# Altium PCB merigold_v2.PcbDoc
Units mm, origin at the board's own origin, x right, y up, seen from the top; angles counter-clockwise.
Board outline 99.57 x 99.57 mm, 2 copper layers (Top Layer, Bottom Layer); 46 components, 37 nets, 173 pads, 10 vias.
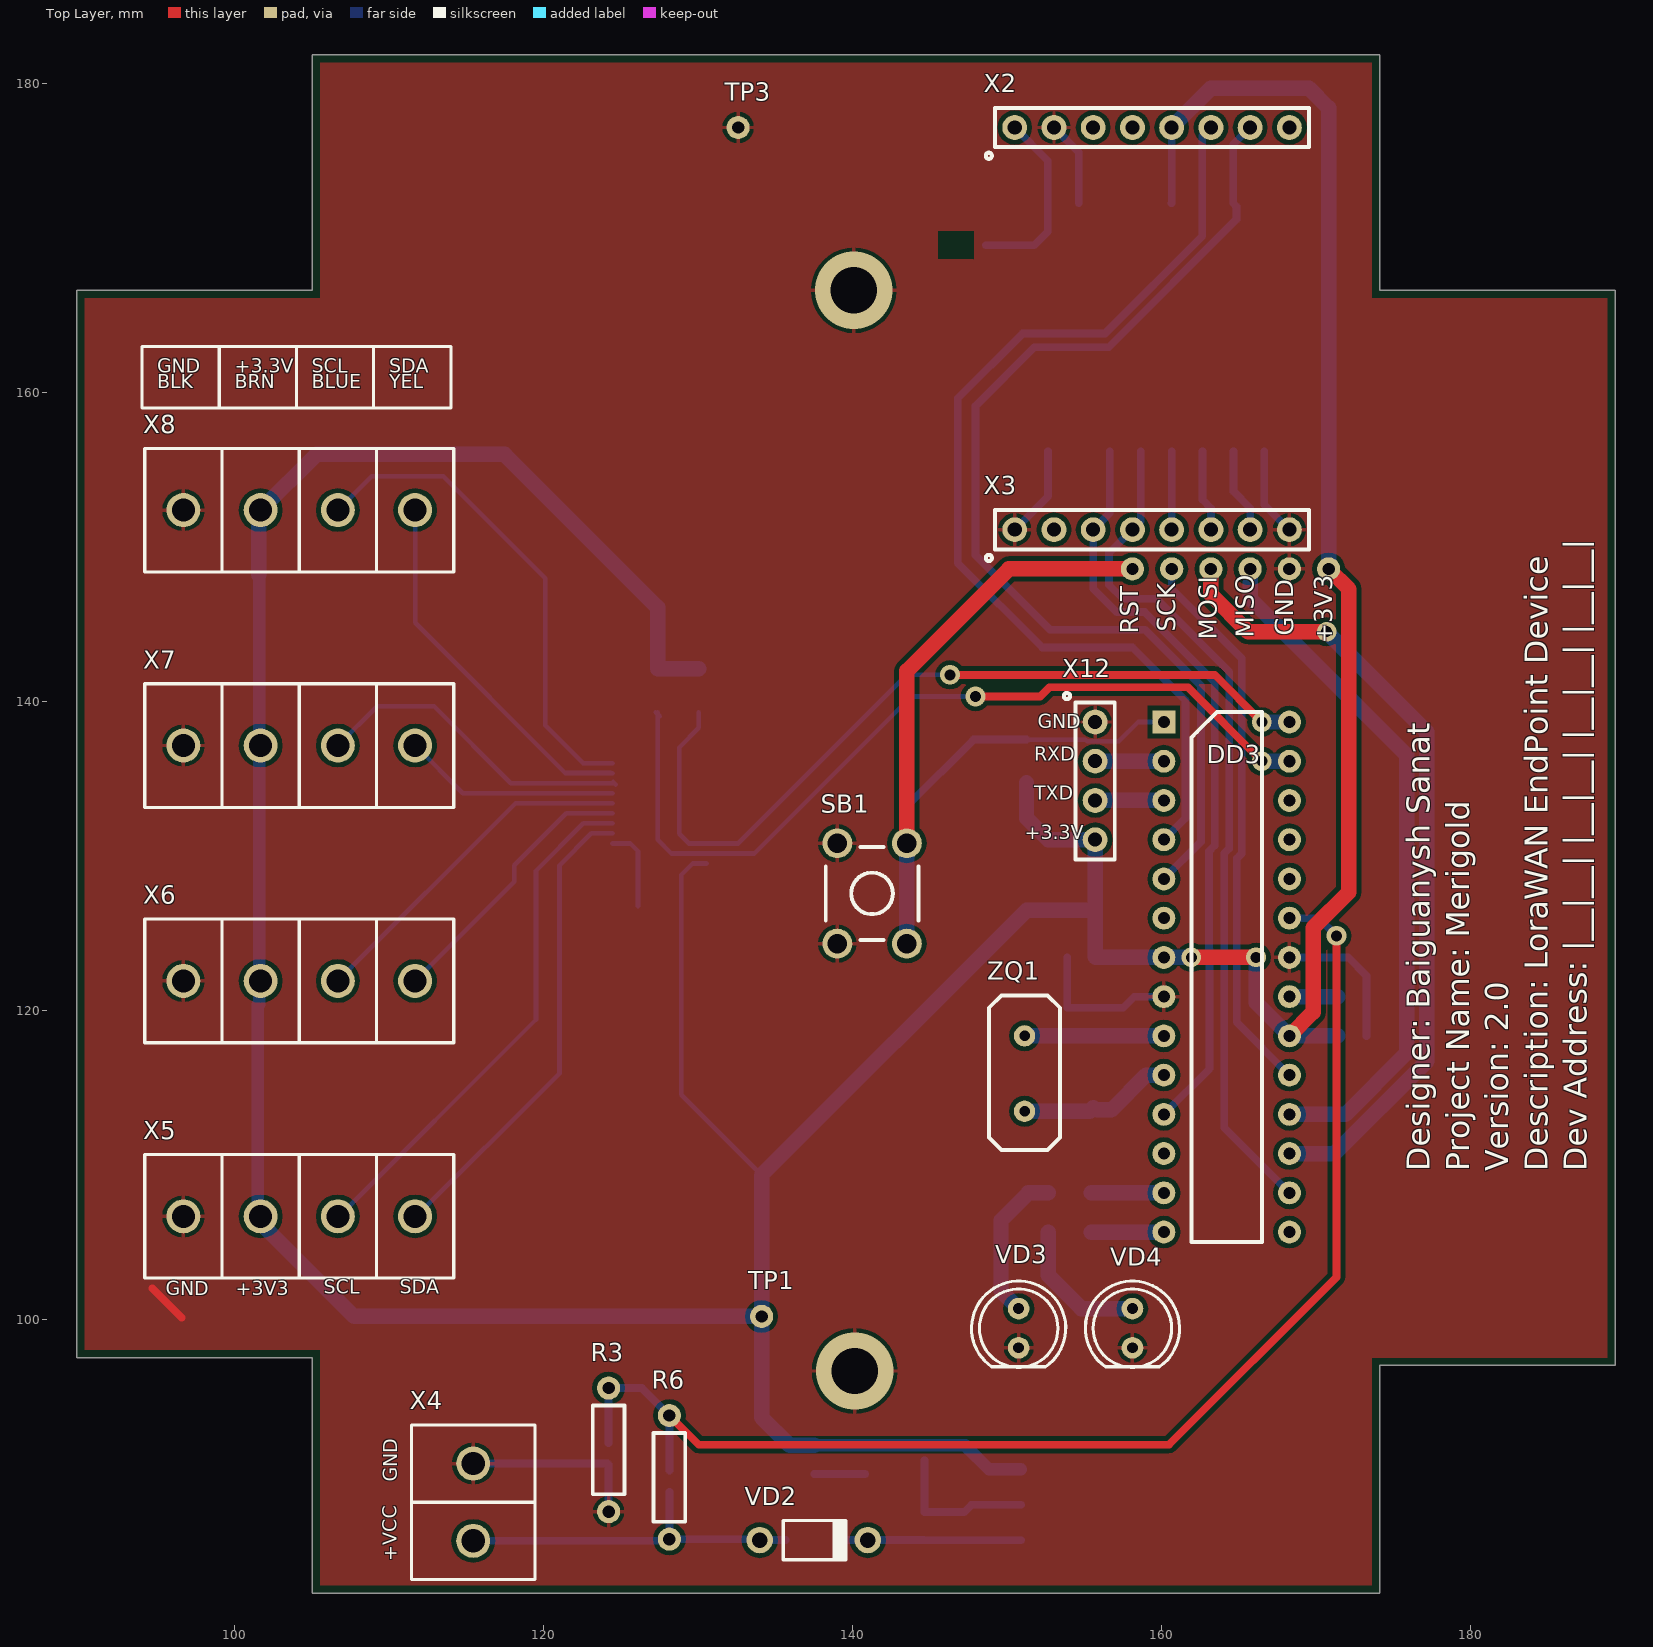
[diagram p0: Top Layer view]
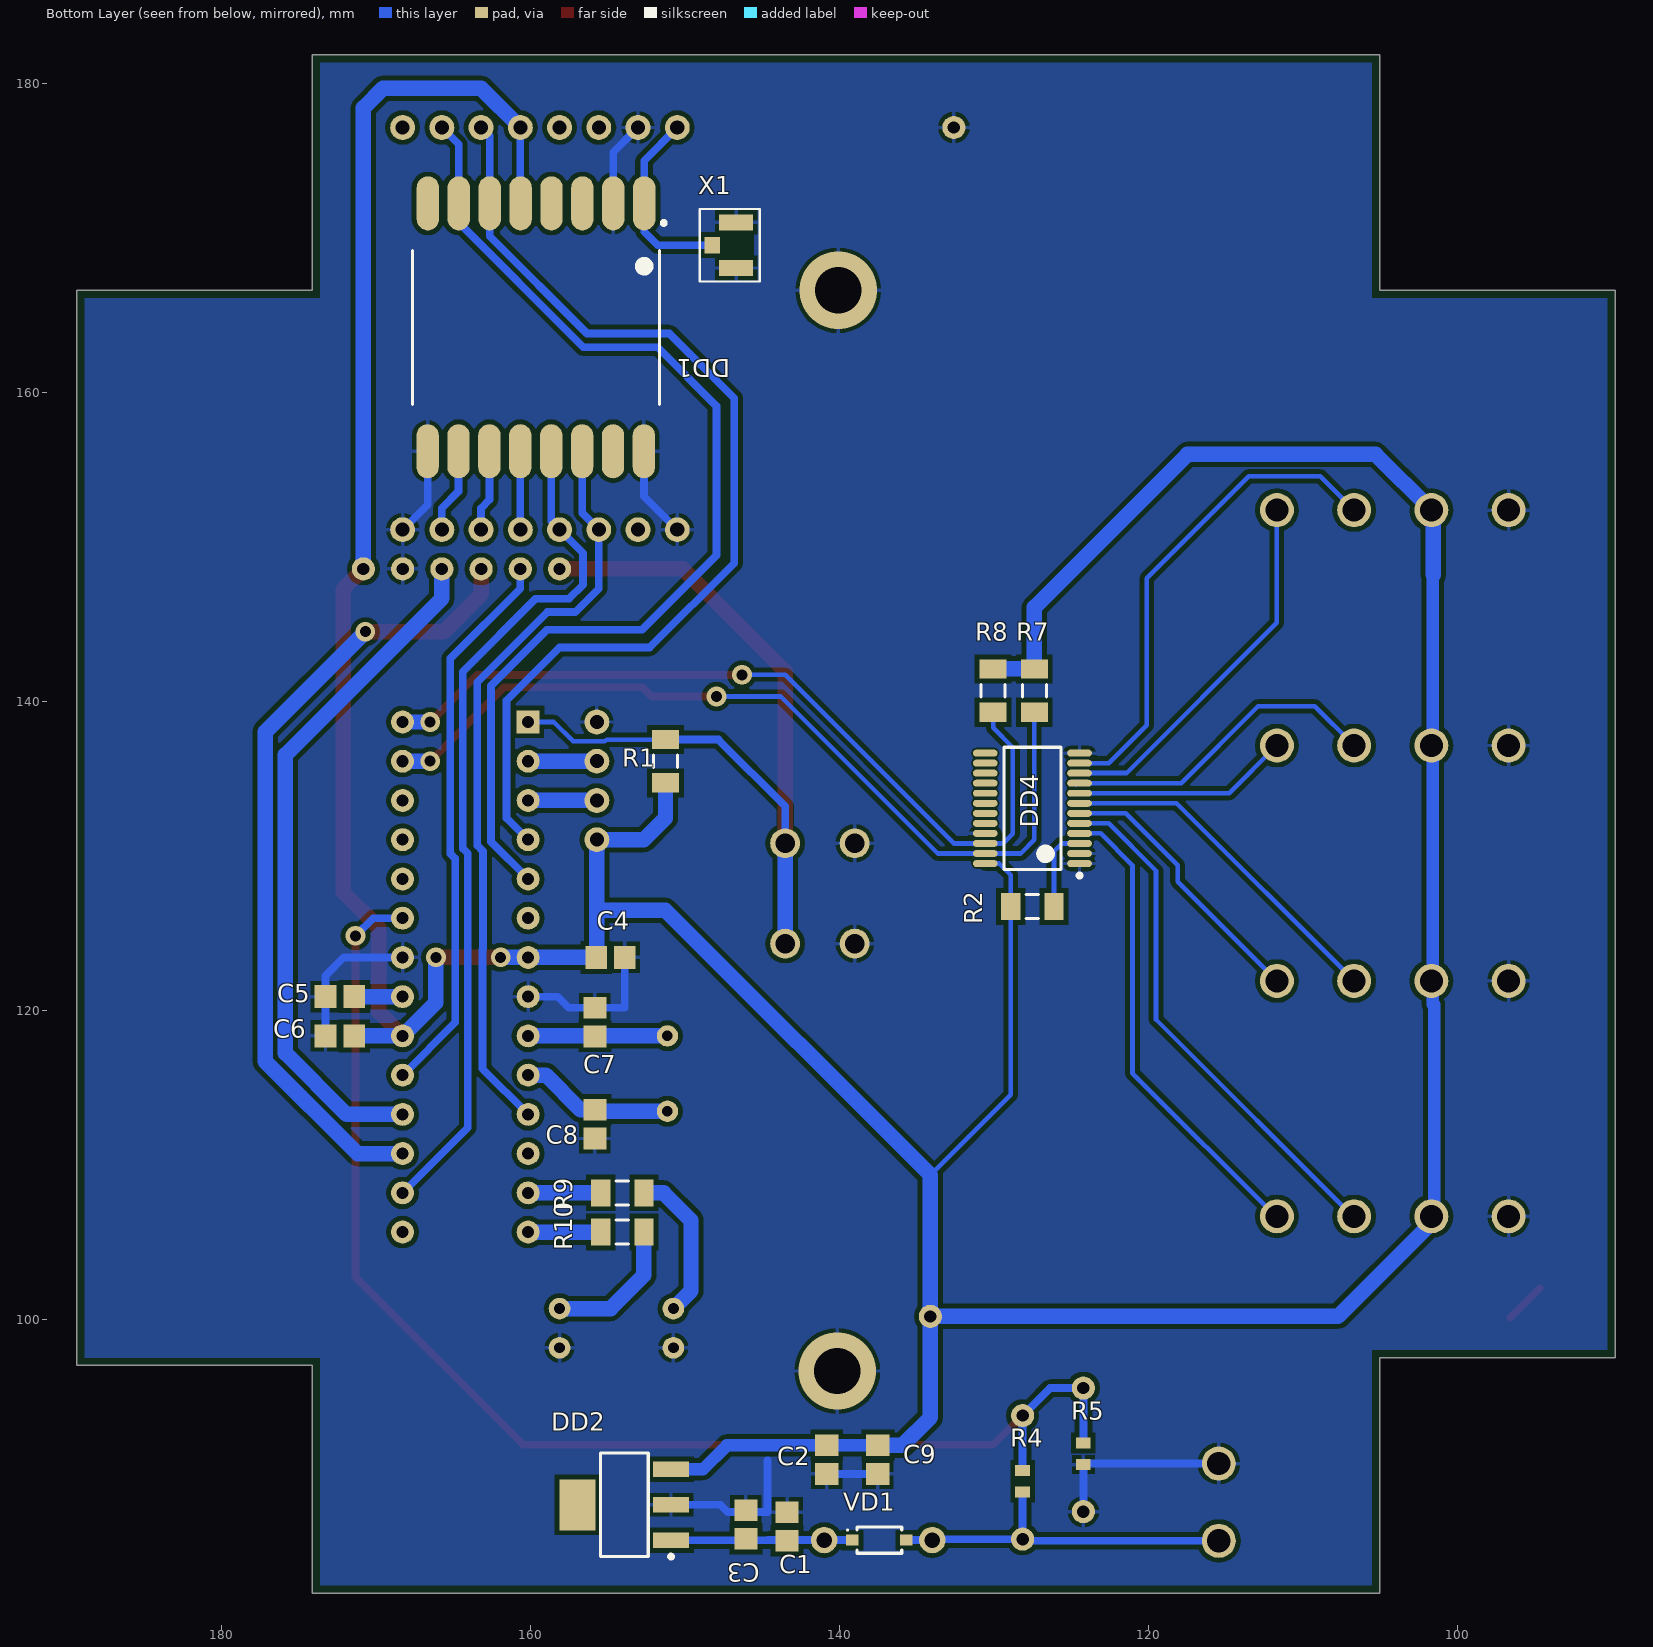
[diagram p1: Bottom Layer view, seen from below]

## Layer stack, top to bottom
Top Solder: solder mask 0.0102, Solder Resist, Dk 3.5
Top Layer: signal copper 0.0356
Dielectric 1: dielectric 0.32, FR-4, Dk 4.8
Bottom Layer: signal copper 0.0356
Bottom Solder: solder mask 0.0102, Solder Resist, Dk 3.5

## Board outline
89.789,97.536 89.789,166.624 105.029,166.624 105.029,181.864 174.117,181.864 174.117,166.624 189.357,166.624 189.357,97.028 174.117,97.028 174.117,82.296 105.029,82.296 105.029,97.536

## Design rules (kind name [scope] priority, off if disabled: settings)
Clearance Clearance_TSSOP [HasFootprint('TSOP65P640X120-24M')] p1: gap=0.1 ignorepadtopadclearanceinfootprint=FALSE
Clearance [All] p2: gap=0.3 ignorepadtopadclearanceinfootprint=FALSE
PolygonConnect [All] p1: connectstyle=Relief reliefconductorwidth=0.254 reliefentries=4 polygonreliefangle="90 Angle" airgapwidth=0.254
RoomDefinition merigold [InComponentClass('merigold')] p1: confinementstyle=ConfineIn formatcopy=TRUE lockcomponents=FALSE outline 79.146,74.295 196.266,74.295 196.266,187.909 79.146,187.909
RoutingVias [All] p1: holewidth=0.711 width=1.27 viastyle="Through Hole" minholewidth=0.711 minwidth=1.27 maxholewidth=0.711 maxwidth=1.27
SolderMaskExpansion [All] p1: expansion=0.102 istentingtop=FALSE
Width [All] p1: maxlimit=5 minlimit=0.254 preferedwidth=0.254
30 further rules are at their usual default settings.

## Components (designator, comment, footprint, x,y, rotation, side; value= is the part's Value field where it differs from the comment)
+3V3 "TP_TH" TH_TP 170.815,148.59 r0 top
C1 "10U10V_CAPC" CAPC2012X14M/0805 143.383,86.614 r270 bottom
C2 "10U10V_CAPC" CAPC2012X14M/0805 140.818,90.932 r90 bottom
C3 "100N50V_CAPC" CAPC2012X14M/0805 146.05,86.741 r270 bottom
C4 "100N50V_CAPC" CAPC2012X14M/0805 154.813,123.444 r0 bottom
C5 "100N50V_CAPC" CAPC2012X14M/0805 172.339,120.904 r0 bottom
C6 "100N50V_CAPC" CAPC2012X14M/0805 172.339,118.364 r0 bottom
C7 "22P250V_CAPC" CAPC2012X14M/0805 155.829,119.253 r270 bottom
C8 "22P250V_CAPC" CAPC2012X14M/0805 155.829,112.649 r90 bottom
C9 "100N50V_CAPC" CAPC2012X14M/0805 137.516,90.932 r90 bottom
DD1 "HPD13A (RFM95)" SOJ200P1600X200-16M 159.639,164.211 r270 bottom
DD2 "LM1117MPX-3.3/NOPB" SOT230P700X180-4M 153.924,88.011 r0 bottom
DD3 "ATMEGA328" PDIP28 164.211,122.174 r0 top
DD4 "TCA9548A" TSOP65P640X120-24M 127.508,133.096 r0 bottom
GND "TP_TH" TH_TP 168.275,148.59 r0 top
MISO "TP_TH" TH_TP 165.735,148.59 r0 top (schematic designator TP7)
MOSI "TP_TH" TH_TP 163.195,148.59 r0 top (schematic designator TP6)
R1 "10K1206" RESC3216X07N/1206 151.257,136.144 r270 bottom
R2 "10K1206" RESC3216X07N/1206 127.508,126.746 r0 bottom
R3 "RNF14FTD100K" RESAD800W55L600D230 124.206,91.567 r90 top
R4 "100K0603" RESC1608X06N/0603 128.143,89.535 r270 bottom
R5 "100K0603" RESC1608X06N/0603 124.206,91.313 r90 bottom
R6 "RNF14FTD100K" RESAD800W55L600D230 128.143,89.789 r270 top
R7 "10K1206" RESC3216X07N/1206 127.381,140.716 r90 bottom
R8 "10K1206" RESC3216X07N/1206 130.048,140.716 r90 bottom
R9 "200R1206" RESC3216X07N/1206 154.051,108.204 r0 bottom
R10 "200R1206" RESC3216X07N/1206 154.051,105.664 r0 bottom
RST "TP_TH" TH_TP 158.115,148.59 r0 top
SB1 "BTN_TACTILE_6X6" BTN_TACTILE_6X6 139.01,124.333 r90 top
SCK "TP_TH" TH_TP 160.655,148.59 r0 top (schematic designator TP5)
TP1 "TP_TH" TH_TP 134.112,100.203 r0 top
TP3 "TP_TH" TH_TP 132.588,177.165 r0 top
VD1 "MBR120VLSFT1G" SOD-123 137.414,85.725 r180 bottom
VD2 "HER107G R0G" DO-204AL 133.985,85.725 r0 top
VD3 "LED_SSL-LX5093GD-TR26" LED500 150.749,100.711 r270 top
VD4 "LED_SSL-LX5093GD-TR26" LED500 158.115,100.711 r270 top
X1 "U.FL-R-SMT-1_sch" U.FL-R-SMT-1 146.685,169.545 r270 bottom
X2 "PLS_8" PLS_8 150.495,177.165 r90 top
X3 "PLS_8" PLS_8 150.495,151.13 r90 top
X4 "2EDGV-5.0-02P" 2EDGV-5.0-02P 115.443,85.678 r90 top
X5 "2EDGV-5.0-04P" 2EDGV-5.0-04P 111.68,106.68 r180 top
X6 "2EDGV-5.0-04P" 2EDGV-5.0-04P 111.68,121.92 r180 top
X7 "2EDGV-5.0-04P" 2EDGV-5.0-04P 111.68,137.16 r180 top
X8 "2EDGV-5.0-04P" 2EDGV-5.0-04P 111.68,152.4 r180 top
X12 "61300411121" PLS_4 155.702,138.684 r0 top
ZQ1 "HC49U-8-30-50-70-30-ATF" XTAL1050X465X350 151.13,113.484 r90 top

## Footprints (in the part's own frame and the unit in brackets; to place one, negate y for a bottom-side part, rotate by r counter-clockwise, add the part's x,y. Pads: shape width x height; smd on the part's side, far side on the other; paste and mask are expansions set on the pad)
2EDGV-5.0-02P [mm]
  round 2.2 hole 1.5: 1(0,0) 2(5,0)
  silkscreen extent -2.5,-4 7.5,4, body extent -2.5,-4 7.5,4, height 12
2EDGV-5.0-04P [mm]
  round 2.2 hole 1.5: 1(0,0) 2(5,0) 3(10,0) 4(15,0)
  silkscreen extent -2.5,-4 17.5,4, body extent -2.5,-4 17.5,4, height 12
BTN_TACTILE_6X6 [mm] "SWITCH TACTILE SPST-NO 0.05A 24V"
  round 1.94 hole 1.24: 1(0,0) 2(6.5,0) 3(0,-4.5) 4(6.5,-4.5)
  silkscreen extent 0.25,-5.25 6.25,0.75, body extent 0.25,-5.25 6.25,0.75, height 8
CAPC2012X14M/0805 [mm] "Chip Capacitor, 2-Leads, Body 2,00x1,25mm, IPC Low Density"
  rect 1.4x1.5 smd: 1(-0.925,0) 2(0.925,0)
  body extent -1,-0.63 1,0.63, height 1.35
DO-204AL [mm]
  round 1.71 hole 1.01: A(0,0) K(7,0)
  silkscreen extent 1.52,-1.27 5.59,1.27
LED500 [mm]
  round 1.4 hole 0.7: A(0,0) K(2.54,0)
  silkscreen extent -1.77,-3.05 3.81,3.05, body extent -1.73,-3 4.27,3, height 8.6
PDIP28 [mil] "Plastic Dual  Inline Package 28-lead"
  rect 58.39x58.39 hole 30.83: 1(-160,650)
  round 58.39 hole 30.83: 2(-160,550) 3(-160,450) 4(-160,350) 5(-160,250) 6(-160,150) 7(-160,50) 8(-160,-50) 9(-160,-150) 10(-160,-250) 11(-160,-350) 12(-160,-450) 13(-160,-550) 14(-160,-650) 15(160,-650) 16(160,-550) 17(160,-450) 18(160,-350) 19(160,-250) 20(160,-150) 21(160,-50) 22(160,50) 23(160,150) 24(160,250) 25(160,350) 26(160,450) 27(160,550) 28(160,650)
  silkscreen extent -90,-675 90,675, body extent -150,-675 150,675, height 180
PLS_4 [mm]
  round 1.61 hole 0.91: 1(0,0) 2(0,-2.54) 3(0,-5.08) 4(0,-7.62)
  silkscreen extent -2.03,-8.89 1.27,1.88
PLS_8 [mm]
  round 1.61 hole 0.91: 1(0,0) 2(0,-2.54) 3(0,-5.08) 4(0,-7.62) 5(0,-10.16) 6(0,-12.7) 7(0,-15.24) 8(0,-17.78)
  silkscreen extent -2.03,-19.05 1.27,1.88
RESAD800W55L600D230 [mm]
  round 1.5 hole 0.8: 1(-4,0) 2(4,0)
  silkscreen extent -2.88,-1.02 2.88,1.02, body extent -3,-1.15 3,1.15, height 3.29
RESC1608X06N/0603 [mm] "Chip Resistor, 2-Leads, Body 1,60x0,82mm, IPC Medium Density"
  rect 0.7x0.95 smd: 1(-0.7,0) 2(0.7,0)
  body extent -0.85,-0.48 0.85,0.48, height 0.6
RESC3216X07N/1206 [mm] "Chip Resistor, 2-Leads, Body 3,20x1,60mm, IPC Medium Density"
  rect 1.25x1.75 smd: 1(-1.4,0) 2(1.4,0)
  silkscreen extent -0.4,-0.77 0.4,0.77, body extent -1.68,-0.87 1.68,0.87, height 0.71
SOD-123 [mm] "SODFL, 2-Leads, Body 1,55x3,70mm, IPC Medium Density"
  rect 0.8x0.7 smd: A(1.75,0) K(-1.75,0)
  silkscreen extent -2.1,-0.85 1.45,0.85, body extent -1.42,-0.85 1.43,0.85, height 1.35
SOJ200P1600X200-16M [mm] "SOJ, 16-Leads, Body 16,00x16,00mm, Pitch 2,00mm, IPC Low Density"
  oval 3.5x1.45 smd: 1(-8.045,7) 2(-8.045,5) 3(-8.045,3) 4(-8.045,1) 5(-8.045,-1) 6(-8.045,-3) 7(-8.045,-5) 8(-8.045,-7) 9(8.001,-7.015) 10(8.001,-5.015) 11(8.001,-3.015) 12(8.001,-1.015) 13(8.001,0.985) 14(8.001,2.985) 15(8.001,4.985) 16(8.001,6.985)
  silkscreen extent -6.9,-8 4.97,8.4, body extent -8,-8 8,8, height 2
SOT230P700X180-4M [mm] "SOT223, 4-Leads, Body 6,50x7,00mm (avg), Pitch 2,30mm, IPC Low Density"
  rect 2.35x1 smd: 1(-3.025,2.3) 2(-3.025,0) 3(-3.025,-2.3)
  rect 2.35x3.3 smd: 4(3.025,0)
  silkscreen extent -3.15,-3.35 1.55,3.47, body extent -1.85,-3.35 1.85,3.35, height 1.8
TH_TP [mm]
  round 1.5 hole 0.8: 1(0,0)
TSOP65P640X120-24M [mm] "TSOP, 24-Leads, Body 7,80x4,40mm, Pitch 0,65mm, IPC Low Density"
  oval 1.6x0.45 smd: 1(-3.05,3.575) 2(-3.05,2.925) 3(-3.05,2.275) 4(-3.05,1.625) 5(-3.05,0.975) 6(-3.05,0.325) 7(-3.05,-0.325) 8(-3.05,-0.975) 9(-3.05,-1.625) 10(-3.05,-2.275) 11(-3.05,-2.925) 12(-3.05,-3.575) 13(3.05,-3.575) 14(3.05,-2.925) 15(3.05,-2.275) 16(3.05,-1.625) 17(3.05,-0.975) 18(3.05,-0.325) 19(3.05,0.325) 20(3.05,0.975) 21(3.05,1.625) 22(3.05,2.275) 23(3.05,2.925) 24(3.05,3.575)
  silkscreen extent -3.17,-3.95 1.85,4.47, body extent -2.25,-3.95 2.25,3.95, height 1.2
U.FL-R-SMT-1 [mm]
  rect 1.05x1 smd mask+0.051: 1(0,-1.55)
  rect 1.05x2.2 smd mask+0.051: 2(1.475,0) 3(-1.475,0)
  Top Layer pour cut-out: -0.914,1.143 0.889,1.143 0.889,-1.118 0.914,-1.143 -0.914,-1.143
  Bottom Layer pour cut-out: -0.914,1.143 0.889,1.143 0.889,-1.118 0.914,-1.143 -0.914,-1.143
  silkscreen extent -2.35,-2.36 2.35,1.53, body extent -1.5,-1.58 1.5,1.52, height 1.25
XTAL1050X465X350 [mm]
  round 1.38 hole 0.68: 1(0,0) 2(4.88,0)
  silkscreen extent -2.5,-2.3 7.5,2.3, body extent -2.5,-2.3 7.5,2.3, height 3.5

## Part data
+3V3 GND MISO MOSI RST SCK TP1 TP3: "TEST POINT THROUGH HOLE"
C1 C2: "CAP CER 10UF 10V X5R 0805", Capacitance="10 µF", Manufacturer="Samsung Electro-Mechanics", Manufacturer Part Number=CL21A106KPFNNNG
C3 C4 C5 C6 C9: "CAP CER 0.1UF 50V Y5V 0805", Capacitance="100 nF", Manufacturer="Samsung Electro-Mechanics", Manufacturer Part Number=CL21F104ZBCNNNC
C7 C8: "CAP CER 22PF 250V C0G/NP0 0805", Capacitance="22 pF", Manufacturer="Murata Manufacturing", Manufacturer Part Number=GRM21A5C2E220JW01
DD1: "RF TXRX MODULE ISM<1GHZ", Manufacturer="RF Solutions", Manufacturer Part Number=RFM95W-868S2, Category="RF/IF and RFID"
DD2: library part AMS1117, "IC REG LIN 3.3V 800MA SOT223-4", Manufacturer="Texas Instruments", Manufacturer Part Number=LM1117MPX-3.3/NOPB
DD3: library part ATMEGA328P-PU, "IC MCU 8BIT 32KB FLASH 28DIP", Manufacturer="Microchip / Atmel", Manufacturer Part Number=ATMEGA328P-PU
DD4: "IC I2C SW 8CH W/RESET 24TSSOP", Manufacturer="Texas Instruments", Manufacturer Part Number=TCA9548APWR
R1 R2 R7 R8: "RES SMD 10K OHM 1% 1/4W 1206", Manufacturer=Panasonic, Manufacturer Part Number=ERJ8ENF1002V, Rated Power="0.25 W", Resistance="10 kO", Tolerance (%)="±1 %"
R3 R6: library part 100K_AD800W55L600D230, "RES 100K OHM 1/4W 5% AXIAL", Manufacturer="Stackpole Electronics", Power (Watts)="0.25W, 1/4W", Resistance (Ohms)=100k, Category=Resistors, Manufacturer Part Number=RNF14FTD100K
R4 R5: "RES SMD 100K OHM 1% 1/4W 0603", Manufacturer=ESR03EZPF1003, Manufacturer Part Number=ESR03EZPF1003
R9 R10: "RES SMD 200 OHM 1% 1/4W 1206", Manufacturer="Vishay Dale", Manufacturer Part Number=CRCW1206200RFKEA
SB1: "SWITCH TACTILE SPST-NO 0.05A 24V", Manufacturer="TE Connectivity Alcoswitch", Manufacturer Part Number=1825910-6, Pole Throw Configuration=SPST
VD1: "DIODE SCHOTTKY 20V 1A SOD123FL", Manufacturer="ON Semiconductor", Manufacturer Part Number=MBR120VLSFT1G
VD2: "DIODE GEN PURP 800V 1A DO204AL", Manufacturer="Taiwan Semiconductor Corporation", Manufacturer Part Number="HER107G R0G"
VD3 VD4: "LED GREEN DIFFUSED T-1 3/4 T/H", Manufacturer=Lumex, Manufacturer Part Number=SSL-LX5093GD-TR26
X1: "CONN U.FL RCPT STR 50 OHM SMD", Manufacturer=Hirose, Manufacturer Part Number=U.FL-R-SMT-1(10), Category="Connectors, Interconnects"
X2 X3: "CONN HEADER VERT 8POS 2.54MM", Manufacturer=Harwin, Manufacturer Part Number=M20-7820842, Category="Connector Headers and PCB Receptacles", Number of Contacts=8, Number of Rows=1, Pitch="2.54 mm"
X4: "TERM BLOCK HDR 2POS VERT 5MM", Manufacturer="Phoenix Contact", Manufacturer Part Number=1753437
X5 X6 X7 X8: "TERM BLOCK HDR 4POS VERT 5MM", Manufacturer="Phoenix Contact", Manufacturer Part Number=1753479
X12: library part PLS_4, "CONN HEADER VERT 4POS 2.54MM", Manufacturer="Wurth Electronics", Category="Connectors, Interconnects", Manufacturer Part Number=61300411121, Number of Contacts=3, Number of Positions=3, Number of Rows=1, Pitch="0.100\" (2.54mm)"
ZQ1: "CRYSTAL 8.0MHZ 30PF SMD", Frequency="8 MHz", Load Capacitance="30 pF", Manufacturer="IQD Frequency Products", Category=Crystals, Manufacturer Part Number=HC49U-8-30-50-70-30-ATF

## Via types
v1: diameter 1.27, hole 0.711, Top Layer to Bottom Layer, tented both sides, 8 vias
v2: diameter 5, hole 3, Top Layer to Bottom Layer, 2 vias

## Nets (pads, with @x,y where several pads share a name; then routed paths per layer and width w, separated by ;. In a path a pad name is that pad's centre, name@x,y a point inside that pad or via, vN(x,y) a via of type N, cw(c..) or ccw(c..) an arc to the next point about the centre after c; other vN are vias at no path point)
+3V3: +3V3.1 C2.2 C4.2 C6.1 C9.2 DD1.5 DD2.3 DD3.7 DD3.20 DD4.24 R1.2 R2.2 R7.2 R8.2 TP1.1 X2.5 X5.3 X6.3 X7.3 X8.3 X12.4 | length 318.8
  Top Layer w1: v1(161.925,123.444) v1(166.116,123.444) ; DD3.20 169.817,119.906 169.817,125.364 172.123,127.67 172.123,147.282 +3V3.1
  Bottom Layer w0.3: DD4.24 129.648,129.521 128.908,128.781 R2.2 128.908,114.551 134.112,109.347 ; TP1.1@134.264,100.203 TP1.1@134.366,100.101
  Bottom Layer w0.5: DD1.5 160.655,172.272 X2.5
  Bottom Layer w0.8: X5.3@101.506,106.426 101.506,120.396 101.6,120.396 101.6,148.209 101.553,148.209 ; C9.2 C2.2 147.284,91.857 148.83,90.311 DD2.3
  Bottom Layer w1: X5.3@101.506,106.426 107.729,100.203 TP1.1 ; 101.553,148.209 101.553,152.273 X8.3 105.287,156.007 117.475,156.007 127.381,146.101 R7.2 R8.2 ; C9.2 135.93,91.857 134.112,93.675 TP1.1 ; R1.2 151.257,132.461 152.654,131.064 X12.4 ; 155.702,127.254 155.702,126.492 ; 155.705,127.254 X12.4@155.705,131.064 ; X2.5 163.195,179.705 169.545,179.705 170.815,178.435 +3V3.1 ; v1(161.925,123.444) DD3.7 C4.2 155.702,123.48 155.702,126.492 ; v1(166.116,123.444) 166.116,120.523 DD3.20 C6.1 ; TP1.1 134.112,104.14 134.112,109.347 151.257,126.492 155.702,126.492
A0: DD3.23 R3.2 R4.1 R5.2 R6.1 | length 85.9
  Top Layer w0.5: R6.1 130.035,91.897 160.477,91.897 171.323,102.743 v1(171.323,124.841)
  Bottom Layer w0.5: R5.2 R3.2 126.365,95.567 R6.1 R4.1 ; DD3.23 170.18,125.984 v1(171.323,124.841)
ANT: DD1.1 X1.1 X2.1 | length 12
  Bottom Layer w0.5: X1.1@148.616,169.545 151.765,169.545 152.639,170.419 DD1.1 152.639,175.021 X2.1
D2: DD1.6 DD3.4 X2.6 | length 66.1
  Bottom Layer w0.5: DD3.4 161.544,132.461 161.544,140.081 158.115,143.51 152.273,143.51 146.812,148.971 146.812,159.639 151.003,163.83 156.337,163.83 162.639,170.132 DD1.6 162.639,176.609 X2.6
D3: DD1.7 DD3.5 X2.7 | length 69.6
  Bottom Layer w0.5: DD3.5 162.552,130.929 162.552,141.028 158.927,144.653 152.781,144.653 147.955,149.479 147.955,159.131 151.765,162.941 156.579,162.941 164.846,171.208 164.846,172.049 DD1.7 164.639,176.069 X2.7
D5: DD1.14 DD3.11 X3.3 | length 49.1
  Bottom Layer w0.5: DD1.14 156.654,152.209 X3.3 155.575,147.32 157.099,145.796 158.916,145.796 163.449,141.263 163.449,130.695 163.068,130.314 163.068,123.977 163.11,123.935 163.11,116.247 DD3.11
D10: DD1.13 DD3.16 X3.4 | length 55.2
  Bottom Layer w0.5: DD1.13 158.654,151.669 X3.4 156.591,149.606 156.591,147.574 157.51,146.655 159.669,146.655 164.385,141.939 164.385,130.499 164.06,130.174 164.06,112.419 DD3.16
D11: DD3.17 MOSI.1 | length 51.4
  Top Layer w1: MOSI.1@163.195,147.955 163.195,146.939 165.608,144.526 v1(170.688,144.526)
  Bottom Layer w1: DD3.17 171.196,110.744 177.165,116.713 177.165,138.049 v1(170.688,144.526)
D12: DD3.18 MISO.1 | length 44.8
  Bottom Layer w1: MISO.1 165.735,146.685 175.865,136.555 175.865,117.251 171.898,113.284 DD3.18
D13: DD3.19 SCK.1 | length 36.2
  Bottom Layer w0.5: SCK.1 160.655,147.32 165.185,142.79 165.185,130.168 164.86,129.843 164.86,119.239 DD3.19
GND: C1.1 C2.1 C3.1 C4.1 C5.2 C6.2 C7.1 C8.1 C9.1 DD1.2 DD1.9 DD1.16 DD2.2 DD3.8 DD3.22 DD4.1 DD4.2 DD4.12 DD4.21 GND.1 R3.1 R5.1 SB1.1 SB1.2 TP3.1 VD3.K VD4.K X1.2 X1.3 X2.2 X3.1 X3.8 X4.2 X5.4 X6.4 X7.4 X8.4 X12.1 | length 64.2
  Top Layer w0.5: 94.666,102.032 96.571,100.127
  Bottom Layer w0.5: X4.2 124.141,90.678 R5.1 R3.1 ; C9.1 C2.1 ; 144.653,90.896 144.653,87.539 147.229,87.539 147.701,88.011 DD2.2 ; X3.1 152.654,153.289 DD1.16 ; X2.2 154.639,175.561 DD1.2 ; C4.1 153.888,120.178 C7.1 157.516,120.178 158.242,120.904 DD3.8 ; DD1.9 166.654,152.751 X3.8 ; DD3.22 172.085,123.444 173.264,122.265 C5.2 C6.2
  Bottom Layer w1: DD3.22 DD3.22@168.311,123.48
  other v2: 140.132,96.672 140.081,166.624
NetC1_2: C1.2 C3.2 DD2.1 VD1.K VD2.K | length 11.7
  Bottom Layer w0.5: VD1.K VD2.K 144.617,85.725 144.631,85.711 DD2.1
NetC5_1: C5.1 DD3.21 | length 3.1
  Bottom Layer w1: DD3.21 C5.1
NetC7_2: C7.2 DD3.9 ZQ1.2 | length 9
  Bottom Layer w1: ZQ1.2 DD3.9
NetC8_2: C8.2 DD3.10 ZQ1.1 | length 9.8
  Bottom Layer w1: ZQ1.1 155.358,113.484 C8.2@155.575,113.701 ; C8.2 156.754,113.574 159.004,115.824 DD3.10
NetDD1_10: DD1.10 X3.7 | length 5.5
  Bottom Layer w0.5: DD1.10 164.654,153.608 165.735,152.527 X3.7
NetDD1_11: DD1.11 X3.6 | length 5.3
  Bottom Layer w0.5: DD1.11 162.654,153.068 163.195,152.527 X3.6
NetDD1_12: DD1.12 X3.5 | length 5.1
  Bottom Layer w0.5: DD1.12 DD1.12 X3.5
NetDD3_13: DD3.13 R9.2 | length 4.7
  Bottom Layer w1: R9.2 DD3.13
NetDD3_14: DD3.14 R10.2 | length 4.7
  Bottom Layer w1: R10.2 DD3.14
NetDD4_3: DD4.3 R2.1 | length 5.4
  Bottom Layer w0.3: DD4.3 125.592,130.821 126.108,130.305 R2.1
NetR4_2: R4.2 R6.2 VD1.A VD2.A X4.1 | length 23.3
  Bottom Layer w0.5: X4.1 128.032,85.678 R6.2 ; R4.2 R6.2 ; VD1.A VD2.A 133.921,85.789 R6.2
NetR9_1: R9.1 VD3.A | length 10
  Bottom Layer w1: VD3.A 149.606,101.854 149.606,106.426 151.384,108.204 R9.1
NetR10_1: R10.1 VD4.A | length 9.2
  Bottom Layer w1: R10.1 152.651,102.873 154.813,100.711 VD4.A
RST: DD3.1 R1.1 RST.1 SB1.3 SB1.4 | length 56.4
  Top Layer w1: SB1.4 143.51,141.986 150.114,148.59 RST.1
  Bottom Layer w0.3: R1.1 155.067,137.544 155.182,137.429 157.241,137.429 158.496,138.684 DD3.1
  Bottom Layer w0.5: SB1.4 143.51,133.223 147.831,137.544 R1.1
  Bottom Layer w1: SB1.3 SB1.4
RXD: DD3.2 X12.2 | length 4.4
  Bottom Layer w1: X12.2 DD3.2
SCL: DD3.28 DD4.22 R8.1 | length 53.9
  Top Layer w0.5: v1(146.304,141.732) 163.449,141.732 v1(166.497,138.684)
  Bottom Layer w0.3: R8.1 130.048,138.303 128.778,137.033 128.778,131.445 129.402,130.821 DD4.22 132.599,130.821 143.51,141.732 v1(146.304,141.732)
  Bottom Layer w1: v1(166.497,138.684) DD3.28
SCL0: DD4.5 X5.2 | length 34.2
  Bottom Layer w0.3: X5.2@106.506,106.426 119.507,119.427 119.507,129.05 122.578,132.121 DD4.5
SCL1: DD4.7 X6.2 | length 22.6
  Bottom Layer w0.3: X6.2@106.6,121.92 X6.2 118.181,133.421 DD4.7
SCL2: DD4.9 X7.2 | length 21.1
  Bottom Layer w0.3: X7.2 109.22,139.7 112.903,139.7 117.882,134.721 DD4.9 ; DD4.9@124.512,134.8 DD4.9@124.675,134.638
SCL3: DD4.11 X8.2 | length 32
  Bottom Layer w0.3: X8.2 108.864,154.584 113.513,154.584 120.107,147.99 120.107,138.465 122.551,136.021 DD4.11
SDA: DD3.27 DD4.23 R7.1 | length 56.7
  Top Layer w0.3: v1@166.116,136.144 v1(166.497,136.144)
  Top Layer w0.5: v1(147.955,140.335) 152.146,140.335 152.743,140.932 161.709,140.932 v1(166.497,136.144)
  Bottom Layer w0.3: R7.1@127.254,139.316 R7.1@127.381,139.189 ; R7.1 R7.1@127.381,139.189 ; R7.1@127.508,139.062 R7.1@127.381,139.189 ; v1(147.955,140.335) 143.785,140.335 133.621,130.171 DD4.23 128.274,130.171 127.381,131.064 R7.1@127.381,139.189
  Bottom Layer w1: v1(166.497,136.144) DD3.27
SDA0: DD4.4 X5.1 | length 31.2
  Bottom Layer w0.3: X5.1@111.506,106.426 121.031,115.951 121.031,129.413 123.089,131.471 DD4.4
SDA1: DD4.6 X6.1 | length 17.9
  Bottom Layer w0.3: X6.1 118.11,128.35 118.11,129.413 121.468,132.771 DD4.6
SDA2: DD4.8 X7.1 | length 14.1
  Bottom Layer w0.3: X7.1 114.769,134.071 DD4.8
SDA3: DD4.10 X8.1 | length 24
  Bottom Layer w0.3: X8.1 111.68,145.114 121.412,135.382 DD4.10@124.333,135.382 ; DD4.10@124.441,135.354 DD4.10
TXD: DD3.3 X12.3 | length 4.4
  Bottom Layer w1: X12.3 DD3.3
pads on no net: DD1.3 DD1.4 DD1.8 DD1.15 DD2.4 DD3.6 DD3.12 DD3.15 DD3.24 DD3.25 DD3.26 DD4.13 DD4.14 DD4.15 DD4.16 DD4.17 DD4.18 DD4.19 DD4.20 X2.3 X2.4 X2.8 X3.2

## Polygon pours and split planes (outlines as drawn)
GND on Bottom Layer "Top Overlay-No Net" (solid, pour order 0): 90.297,98.044 90.297,166.116 105.537,166.116 105.537,181.356 173.609,181.356 173.609,166.116 188.849,166.116 188.849,97.536 173.609,97.536 173.609,82.804 105.537,82.804 105.537,98.044
GND on Top Layer "Top Overlay-No Net" (solid, pour order 2): 90.297,98.044 90.297,166.116 105.537,166.116 105.537,181.356 173.609,181.356 173.609,166.116 188.849,166.116 188.849,97.536 173.609,97.536 173.609,82.804 105.537,82.804 105.537,98.044

## Silkscreen, mask and mechanical layers (free items; w line width, h text height)
Top Overlay:
  lines w0.2: 99,159 99,163 ; 104,159 104,163 ; 109,159 109,163 ; 94,159 94,163 114,163 114,159 94,159
  text "GND" at 95,161 h1.52
  text "+3.3V" at 100,161 h1.52
  text "SCL" at 105,161 h1.52
  text "SDA" at 110,161 h1.52
  text "BLK" at 95,160 h1.52
  text "BRN" at 100,160 h1.52
  text "BLUE" at 105,160 h1.52
  text "YEL" at 110,160 h1.52
  text "GND" at 152,138 h1.52
  text "RXD" at 151.765,135.89 h1.52
  text "TXD" at 151.765,133.35 h1.52
  text "+3.3V" at 151.13,130.81 h1.52
  text "Designer: Baiguanysh Sanat / Project Name: Merigold / Version: 2.0 / Description: LoraWAN EndPoint Device / Dev Address: |__|__| |__|__| |__|__| |__|__|" at 188.011,109.601 h2.54 r90
  text "SCL" at 105.766,101.397 h1.52
  text "SDA" at 110.693,101.371 h1.52
  text "+3V3" at 100.076,101.295 h1.52
  text "GND" at 95.529,101.27 h1.52
  text "GND" at 110.82,89.51 h1.52 r90
  text "+VCC" at 110.795,84.353 h1.52 r90
Mechanical 2:
  the board outline again, w0.5